# Altium PCB ch3v003f4p6 v2.PcbDoc
Units mm, origin at the board's own origin, x right, y up, seen from the top; angles counter-clockwise.
Board outline 152.4 x 101.6 mm, 2 copper layers (Top Layer, Bottom Layer); 30 components, 34 nets, 125 pads, 15 vias.
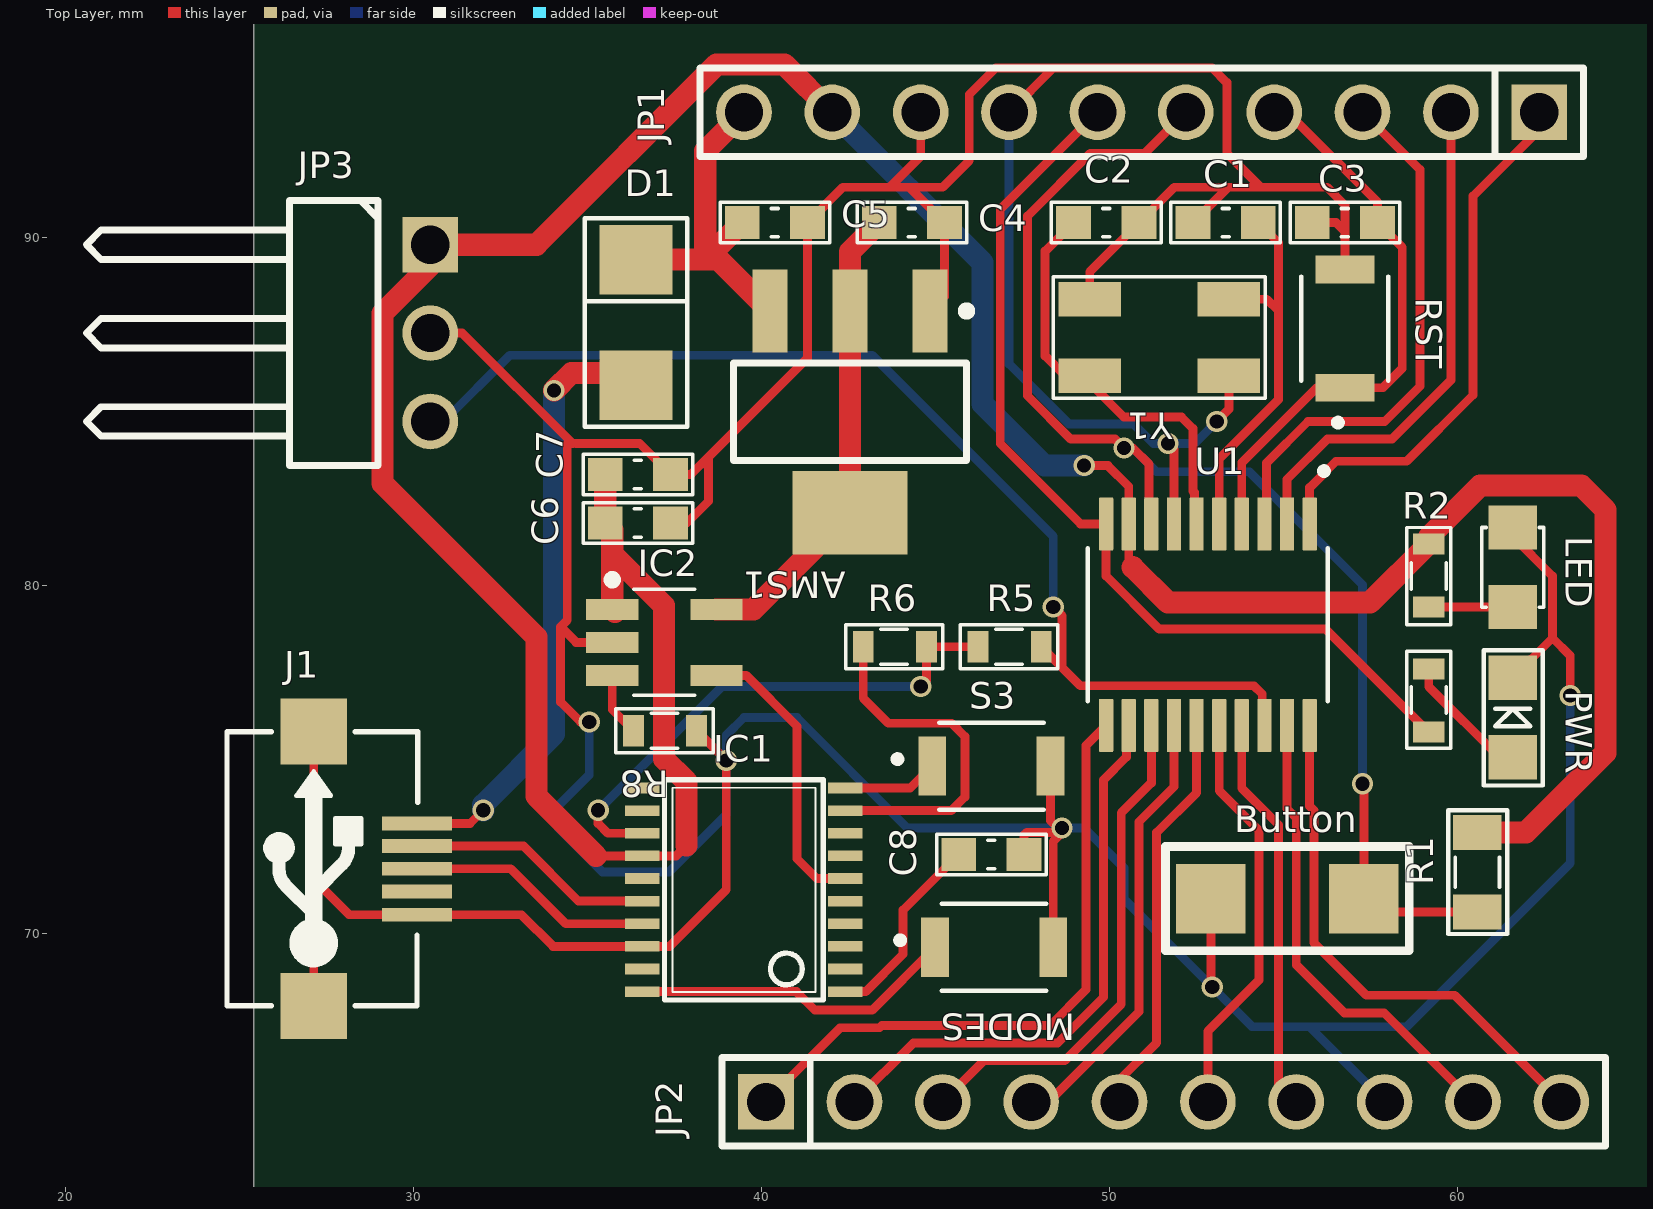
[diagram p0: Top Layer view]
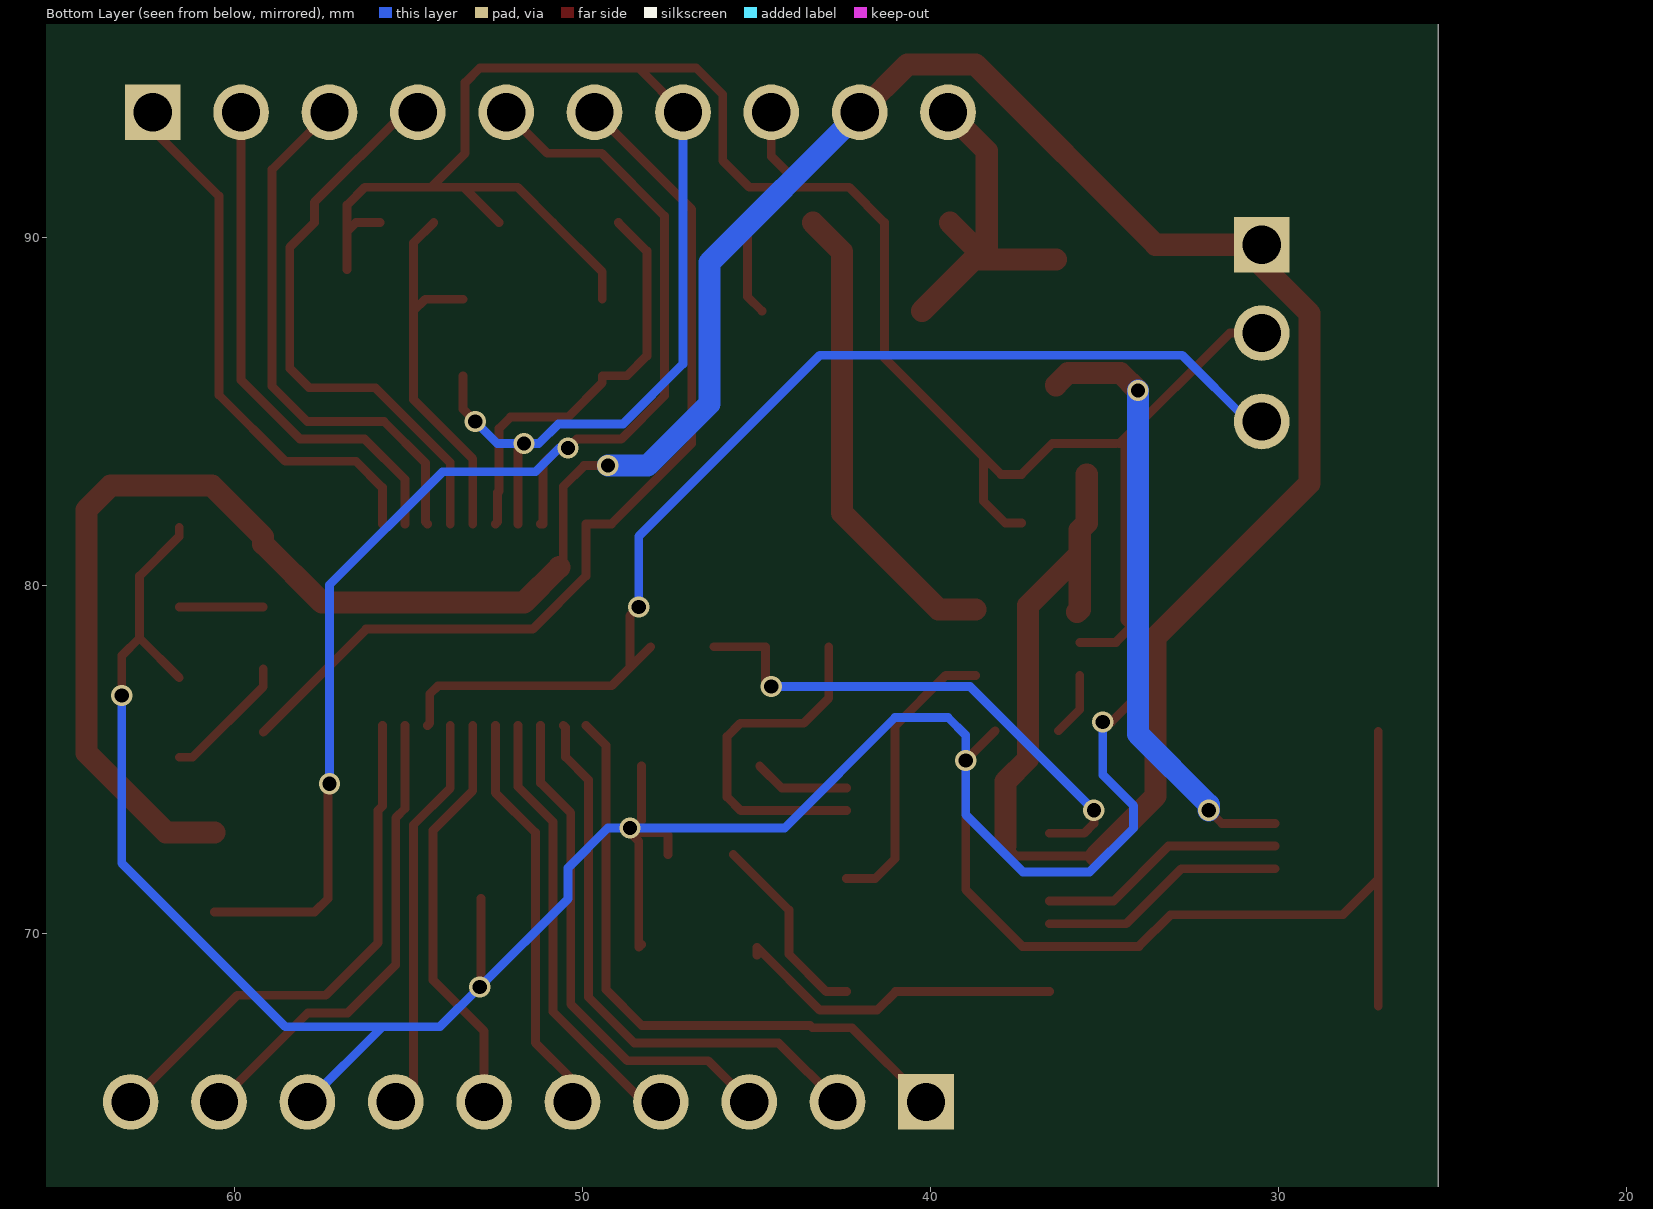
[diagram p1: Bottom Layer view, seen from below]
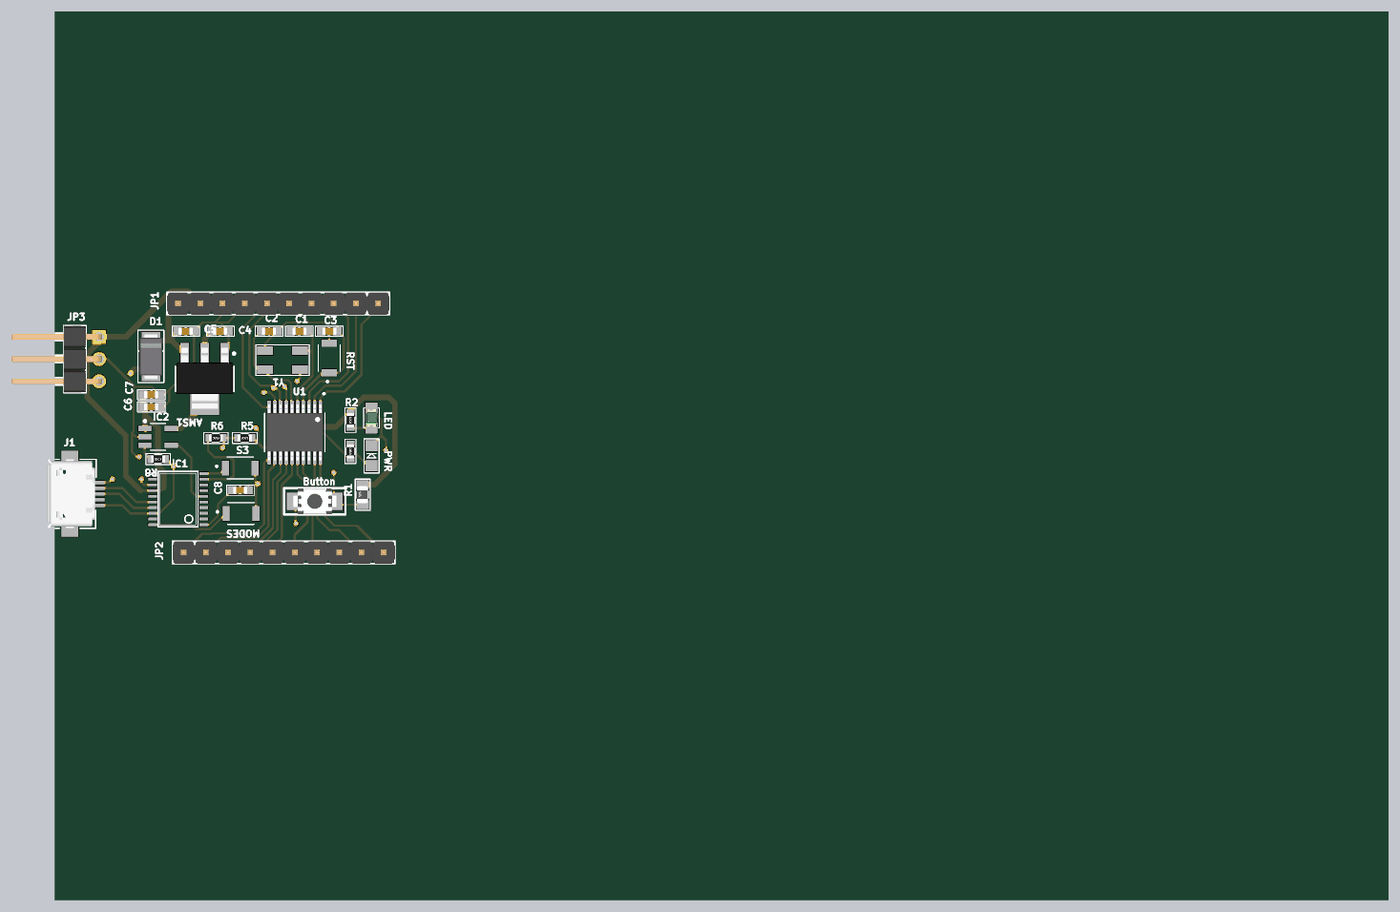
[diagram p2: 3D render of the assembled board from above, using the file's embedded part models]

## Layer stack, top to bottom
Top Solder: solder mask 0.0102, Solder Resist, Dk 3.5
Top Layer: signal copper 0.0356
Dielectric 1: dielectric 0.32, FR-4, Dk 4.8
Bottom Layer: signal copper 0.0356
Bottom Solder: solder mask 0.0102, Solder Resist, Dk 3.5

## Board outline
25.4,25.4 177.8,25.4 177.8,127 25.4,127

## Design rules (kind name [scope] priority, off if disabled: settings)
Clearance [All] p1: gap=0.254 ignorepadtopadclearanceinfootprint=TRUE
PolygonConnect [All] p1: connectstyle=Relief reliefconductorwidth=0.254 reliefentries=4 polygonreliefangle="90 Angle" airgapwidth=0.254
RoutingVias [All] p1: holewidth=0.406 width=0.61 viastyle="Through Hole" minholewidth=0.406 minwidth=0.61 maxholewidth=0.406 maxwidth=0.61
SolderMaskExpansion [All] p1: expansion=0.102
Width [All] p1: maxlimit=0.635 minlimit=0.254 preferedwidth=0.508 minimp=50.000000 maximp=50.000000 favimp=50.000000
30 further rules are at their usual default settings.

## Classes and differential pairs
component class ch32v003f4p6: C1 C2 C3 C4 C5 C6 C7 C8 D1 IC1 J1 JP1 JP2 JP3 LED_POWER LED_USER R1 R2 R5 R6 R8 RST S3 U1 Y1

## Components (designator, comment, footprint, x,y, rotation, side; value= is the part's Value field where it differs from the comment)
AMS1 "AMS1117-3.3V" SOT223 42.545,84.984 r180 top value="AMS1117-3.3V SOT223"
Button "SW-SMD" "SW 3x2x4" 55.118,70.993 r180 top (schematic designator S2)
C1 "22pF" CAP_0603 53.34,90.424 r0 top value=33p
C2 "22pF" CAP_0603 49.911,90.424 r180 top value=33p
C3 "104" CAP_0603 56.769,90.424 r0 top value=33p
C4 "104" CAP_0603 44.323,90.424 r180 top value=33p
C5 "104" CAP_0603 40.386,90.424 r180 top value=33p
C6 "104" CAP_0603 36.449,81.788 r180 top value=33p
C7 "104" CAP_0603 36.449,83.185 r180 top value=33p
C8 "104" CAP_0603 46.609,72.263 r180 top value=33p
D1 "1N4007" DIO-214AC(SMA) 36.449,87.63 r270 top
IC1 "CH32V305FBP6" TSSOP-20 39.497,71.247 r90 top
IC2 "DIO7002BST5" SOT23-5 37.211,78.359 r0 top
J1 "USB-5" USB-M1 30.099,71.852 r90 top
JP1 "JP 1x10 2.54" "JP 1x10 DT" 62.357,93.599 r180 top
JP2 "JP 1x10 2.54" "JP 1x10 DT" 40.132,65.151 r0 top
JP3 "JP 1x3 2.54" "JP 1x3 DC" 27.94,83.439 r270 top
L1 "LED 0805" LED-0805-Green 61.595,79.375 r90 top
L2 "LED 0805" LED_RED_SMD_0805 61.595,76.2 r90 top
R1 "10k" RES_SMD_0805 60.579,71.755 r90 top value="R1/4W - 1K"
R2 "1k" RES-SMD-0603 59.182,80.264 r90 top value="R1/4W - 1K"
R3 "1k" RES-SMD-0603 59.182,76.708 r270 top value="R1/4W - 1K"
R5 "100R" RES-SMD-0603 47.117,78.232 r0 top value="R1/4W - 1K"
R6 "100R" RES-SMD-0603 43.815,78.232 r0 top value="R1/4W - 1K"
R8 "15k" RES-SMD-0603 37.211,75.819 r0 top value="R1/4W - 1K"
RST "B3U-1000P" SW_B3U-1000P 56.769,87.376 r90 top (schematic designator S1)
S3 "B3U-1000P" SW_B3U-1000P 46.609,74.803 r0 top
S4 "B3U-1000P" SW_B3U-1000P 46.687,69.596 r0 top
U1 "CH32V003F4P6" SOP65P640X121-20N 52.832,78.867 r270 top
Y1 "24MHz" "Crystal 4 pin SMD 50x32" 51.435,87.122 r180 top

## Footprints (in the part's own frame and the unit in brackets; to place one, negate y for a bottom-side part, rotate by r counter-clockwise, add the part's x,y. Pads: shape width x height; smd on the part's side, far side on the other; paste and mask are expansions set on the pad)
CAP_0603 [mm]
  rect 1x0.95 smd mask+0.076: 1(-0.94,0) 2(0.94,0)
  silkscreen extent -1.57,-0.58 1.57,0.58, body extent -0.77,-0.39 0.83,0.41, height 0.9
"Crystal 4 pin SMD 50x32" [mm] "Quartz Crystal, SM; Body 6.0 x 3.5 mm (LxW)"
  rect 1.8x1 smd: 1(-2,-1.1) 2(2,-1.1) 3(2,1.1) 4(-2,1.1)
  silkscreen extent -3.05,-1.75 3.05,1.75, body extent -2.48,-1.6 2.53,1.6, height 0.9
DIO-214AC(SMA) [mm] "DO-214AC Diode Smallest Size"
  rect 2x2.1 smd: 1(1.88,-0.051) 2(-1.732,-0.051)
  silkscreen extent -2.92,-1.52 3.07,1.42, body extent -2.5,-1.35 2.7,1.25, height 2.4
"JP 1x3 DC" [mm]
  rect 1.6x1.6 hole 1.1: 1(-6.35,2.54)
  round 1.6 hole 1.1: 2(-3.81,2.54) 3(-1.27,2.54)
  silkscreen extent -7.62,-7.34 0,1.04, body extent -7.62,-7.52 0,2.84, height 2.55
"JP 1x10 DT" [mm] "10 pins, 1 row, straight, gold plating"
  rect 1.6x1.6 hole 1.1: 1(0,0)
  round 1.6 hole 1.1: 2(2.54,0) 3(5.08,0) 4(7.62,0) 5(10.16,0) 6(12.7,0) 7(15.24,0) 8(17.78,0) 9(20.32,0) 10(22.86,0)
  silkscreen extent -1.27,-1.27 24.13,1.27, body extent -1.27,-1.27 24.13,1.27, height 8.54
LED-0805-Green [mil]
  rect 50x55 smd: 1(0,0) 2(90,0)
  silkscreen extent 0,-35 90,35, body extent 5,-25 85,25, height 43
LED_RED_SMD_0805 [mil]
  rect 50x55 smd: 1(-45,0) 2(45,0)
  silkscreen extent -77,-34 76,33, body extent -41,-27 41,27, height 35
RES-SMD-0603 [mm]
  rect 0.6x0.9 smd: 1(-0.889,0) 2(0.927,0)
  silkscreen extent -1.4,-0.64 1.4,0.64, body extent -0.8,-0.4 0.8,0.4, height 0.43
RES_SMD_0805 [mil]
  rect 39.37x55 smd: 1(-45,0) 2(45,0)
  silkscreen extent -70,-34 70,33, body extent -39,-25 39,25, height 31
SOP65P640X121-20N [mm]
  rrect12% 1.52x0.41 smd: 1(-2.895,2.925) 2(-2.895,2.275) 3(-2.895,1.625) 4(-2.895,0.975) 5(-2.895,0.325) 6(-2.895,-0.325) 7(-2.895,-0.975) 8(-2.895,-1.625) 9(-2.895,-2.275) 10(-2.895,-2.925) 11(2.895,-2.925) 12(2.895,-2.275) 13(2.895,-1.625) 14(2.895,-0.975) 15(2.895,-0.325) 16(2.895,0.325) 17(2.895,0.975) 18(2.895,1.625) 19(2.895,2.275) 20(2.895,2.925)
  silkscreen extent -4.51,-3.45 2.2,3.45, body extent -3.2,-3.25 3.2,3.25, height 1.1
SOT23-5 [mm] "SOT23, 5-Leads, Body 3.0x3.0mm (max), Pitch 0.95mm, IPC Medium Density"
  rect 1.5x0.6 smd: 1(-1.5,0.95) 2(-1.5,0) 3(-1.5,-0.95) 4(1.5,-0.95) 5(1.5,0.95)
  silkscreen extent -1.62,-1.52 0.87,1.92, body extent -1.75,-1.52 1.75,1.53, height 1.45
SOT223 [mm]
  rect 1x2.4 smd: 1(-2.3,-2.9) 2(0,-2.9) 3(2.3,-2.9)
  rect 3.3x2.4 smd: 4(0,2.9)
  silkscreen extent -3.48,-3.02 3.35,1.4, body extent -3.25,-3.56 3.25,3.4, height 1.68
"SW 3x2x4" [mm]
  rect 2x2 smd: 1(-2.2,0) 2(2.2,0)
  silkscreen extent -3.5,-1.5 3.5,1.5, body extent -2.45,-1.45 2.45,1.45, height 2
SW_B3U-1000P [mm]
  rect 0.8x1.7 smd: 1(-1.7,0) 2(1.7,0)
  silkscreen extent -2.8,-1.25 1.5,1.25
TSSOP-20 [mil] "TSSOP-20"
  rect 12x39 smd: 1(-115.16,-114.87) 2(-89.57,-114.87) 3(-63.98,-114.87) 4(-38.39,-114.87) 5(-12.8,-114.87) 6(12.8,-114.87) 7(38.39,-114.87) 8(63.98,-114.87) 9(89.57,-114.87) 10(115.16,-114.87) 11(115.16,114.87) 12(89.57,114.87) 13(63.98,114.87) 14(38.39,114.87) 15(12.8,114.87) 16(-12.8,114.87) 17(-38.39,114.87) 18(-63.98,114.87) 19(-89.57,114.87) 20(-115.16,114.87)
  silkscreen extent -125,-90 125,90
USB-M1 [mm]
  rect 0.4x2 smd: 1(1.3,0) 2(0.65,0) 3(0,0) 4(-0.65,0) 5(-1.321,0)
  rect 1.9x1.9 smd: 5(-3.95,2.968) 5(3.95,2.968)
  silkscreen extent -3.94,-0.03 3.94,5.46, body extent -3.98,0.11 4,5.54, height 2.71

## Part data
AMS1: library part "AMS1117 SMD", "Dán", Chung_Loai=Dán, Don_Vi=Con, Ma_Hang=MH000596
Button: "Switch", LatestRevisionDate=17-Jul-2002, LatestRevisionNote="Re-released for DXP Platform.", PackageReference=SPST-2, Published=24-Mar-1999, Publisher="Altium Limited"
C1 C2 C3 C4 C5 C6 C7 C8: library part CapSMD, "Capacitor", LatestRevisionDate=17-Jul-2002, LatestRevisionNote="Re-released for DXP Platform.", PackageReference=RAD-0.3, Published=8-Jun-2000, Publisher="Altium Limited"
D1: library part D1A, "Diode 1A"
IC2: library part "DIO7002BST5 SMD"
J1: Manufacturer=FCI, Manufacturer Part Number=10118193-0001LF, Supplier Part Number 1=609-4616-1-ND, .Checked PCB=RF, .Checked SCH=MM, .Creator=MM, Category="Connectors, Interconnects", ComponentLink1Description=http://portal.fciconnect.com/Comergent//fci/drawing/10118193.pdf, ComponentLink1URL=http://portal.fciconnect.com/Comergent//fci/drawing/10118193.pdf, Connector Type="USB - micro B", Features="Shielded, Solder Retention", Gender=Receptacle, Ingress Protection=-, Mounting Type="Surface Mount, Right Angle, Horizontal", Number of Contacts=5, Packaging="Cut Tape (CT)", Pricing 1="1=0.46, 10=0.433, 25=0.3712, 50=0.3156, 100=0.3032, 250=0.27224, 500=0.25988 (USD)", RoHS="RoHS Compliant", Specifications="USB 2.0", Stock 1=28642, Supplier 1=Digi-Key
JP1 JP2: library part "JP 1x10 2.54 Duc Thang", "C?m", Chung_Loai=C?m, Don_Vi=Con, Ma_Hang=MH000903, Ten_Linh_Kien="Jump Ðon Ð?c 2.54MM 1x40P Th?ng 11MM"
JP3: library part "JP 1x3 2.54 Duc Cong", "C?m", Chung_Loai=C?m, Don_Vi=Con, Ma_Hang=MH000904, Ten_Linh_Kien="Jump Ðon Ð?c 2.54MM 1x40P Cong Ð?ng"
L1 L2: library part "LED 0805 Xanh La", "Dán", Chung_Loai=Dán, Don_Vi=Con, Ma_Hang=MH002326, Ten_Linh_Kien="LED 0805 Màu Xanh Lá (Green)"
R1 R2 R3 R5 R6 R8: library part RES, "Resistor 1/4W"
RST S3 S4: "Switch Tactile N.O. SPST Round Button Gull Wing 0.05A 12VDC 1.5N SMD Embossed T/R", Package=None, Availability=Unavailable, MP=B3U-1000P, Price=None
U1: "Industrial-grade general-purpose microcontroller", Package=Package, Check_prices=https://www.snapeda.com/parts/CH32V003F4P6/WCH/view-part/?ref=eda, MF=WCH, MP=CH32V003F4P6, SnapEDA_Link=https://www.snapeda.com/parts/CH32V003F4P6/WCH/view-part/?ref=snap
Y1: library part "XTAL_4Pin SMD", "Crystal Oscillator", LatestRevisionDate=17-Jul-2002, LatestRevisionNote="Re-released for DXP Platform.", PackageReference=R38, Published=8-Jun-2000, Publisher="Altium Limited"

## Via types
v1: diameter 0.61, hole 0.406, Top Layer to Bottom Layer, 15 vias

## Nets (pads, with @x,y where several pads share a name; then routed paths per layer and width w, separated by ;. In a path a pad name is that pad's centre, name@x,y a point inside that pad or via, vN(x,y) a via of type N, cw(c..) or ccw(c..) an arc to the next point about the centre after c; other vN are vias at no path point)
3V3: C6.2 C7.2 IC1.14 IC2.1 JP1.9 JP3.1 R1.2 R2.2 U1.9 | length 96.2
  Top Layer w0.254: 35.248,72.222 IC1.14 37.551,72.222 37.846,72.517 ; v1(49.276,83.439) 49.957,83.439 50.557,82.839 U1.9 50.557,80.634 50.673,80.518
  Top Layer w0.635: 35.248,72.222 33.528,73.942 33.528,78.514 29.108,82.934 29.108,87.817 30.48,89.189 JP3.1 33.528,89.789 38.71,94.971 40.665,94.971 JP1.9 ; C7.2 C6.2 35.711,81.586 35.711,80.899 ; IC2.1@35.79,79.23 IC2.1 35.711,80.899 ; 37.846,72.517 37.846,74.361 37.193,75.014 37.193,79.417 35.711,80.899 ; 50.673,80.518 51.689,79.502 57.493,79.502 R2.2 59.182,81.39 60.66,82.867 63.563,82.867 64.262,82.169 64.262,75.184 61.976,72.898 R1.2
  Bottom Layer w0.635: JP1.9 46.355,89.281 46.355,85.217 48.133,83.439 v1(49.276,83.439)
3V3_IN: AMS1.2 AMS1.4 C4.2 IC2.5 | length 13.7
  Top Layer w0.635: IC2.5 39.77,79.309 AMS1.4 AMS1.2 42.545,89.586 C4.2
5V_IN: AMS1.3 C5.2 D1.2 JP1.10 | length 10.7
  Top Layer w0.635: D1.2 38.385,89.362 ; C5.2 38.385,89.362 ; JP1.10 38.385,92.487 38.385,89.362 ; AMS1.3 38.767,89.362 38.385,89.362
D+: IC1.17 J1.3 | length 7.1
  Top Layer w0.254: J1.3 32.796,71.852 34.376,70.272 IC1.17
D-: IC1.16 J1.2 | length 7.1
  Top Layer w0.254: J1.2 33.162,72.502 34.742,70.922 IC1.16
GND: AMS1.1 Button.2 C1.1 C2.1 C3.1 C4.1 C5.1 C6.1 C7.1 C8.1 IC1.18 IC2.2 J1.5 JP1.7 JP1.8 JP2.8 JP3.2 L1.2 L2.2 R8.2 RST.2 S3.2 S4.2 U1.7 Y1.2 Y1.4 | length 183.2
  Top Layer w0.254: J1.5@27.131,67.902 27.131,71.548 ; J1.5@27.131,75.802 27.131,71.548 ; JP3.2 31.397,87.249 34.572,84.074 34.417,84.074 34.417,78.994 34.227,78.803 ; 34.671,84.074 36.5,84.074 C7.1 37.973,83.185 38.481,83.693 ; v1(35.052,76.073) 34.798,76.073 34.227,76.644 34.227,78.803 ; IC2.2 34.671,78.359 34.227,78.803 ; C6.1 37.846,81.788 38.481,82.423 38.481,83.693 ; R8.2 v1(38.989,74.968) 38.989,71.247 37.364,69.622 IC1.18 34.01,69.622 33.101,70.531 30.099,70.531 28.148,70.531 27.131,71.548 ; JP1.8 44.577,92.329 43.688,91.44 ; AMS1.1 45.263,88.302 C4.1 44.247,91.44 ; JP1.7 48.387,94.869 ; C8.1 47.549,72.822 47.625,72.898 v1@48.641,72.898 ; S4.2@48.309,69.674 S4.2 48.387,72.644 v1@48.641,72.898 ; S3.2 48.309,73.23 v1@48.641,72.898 ; Y1.2 49.435,89.008 C2.1 51.867,91.44 53.416,91.44 ; v1(51.689,84.074) 51.857,83.906 U1.7 ; C1.1 53.416,91.44 ; Button.2 52.918,68.494 v1(52.959,68.453) ; v1(53.086,84.709) 53.435,85.058 Y1.4 ; C3.1 56.515,90.424 56.769,90.17 ; RST.2 56.769,90.17 ; L2.2 62.738,78.486 ; L1.2 61.595,81.407 62.738,80.264 62.738,78.486 ; v1@63.246,76.708 v1(63.246,76.835) 63.246,77.978 62.738,78.486 ; 38.481,83.693 41.326,86.538 C5.1 42.342,91.44 43.688,91.44 ; 43.688,91.44 44.247,91.44 ; 44.247,91.44 45.212,91.44 45.974,92.202 45.974,94.107 46.736,94.869 48.387,94.869 ; 48.387,94.869 52.959,94.869 53.378,94.45 53.378,92.418 54.356,91.44 ; 53.416,91.44 54.356,91.44 ; 54.356,91.44 56.261,91.44 56.769,90.932 56.769,90.17
  Bottom Layer w0.254: v1(35.052,76.073) 35.052,74.549 34.163,73.66 34.163,73.025 35.433,71.755 37.338,71.755 38.989,73.406 v1(38.989,74.968) 38.989,75.692 39.497,76.2 41.021,76.2 44.196,73.025 v1(48.641,73.025) 49.276,73.025 50.419,71.882 50.419,70.993 v1(52.959,68.453) 54.102,67.31 55.753,67.31 ; JP1.7 47.117,86.36 48.844,84.633 50.703,84.633 51.262,84.074 v1(51.689,84.074) 52.451,84.074 v1(53.086,84.709) ; JP2.8 55.753,67.31 ; v1(63.246,76.835) 63.246,72.009 58.547,67.31 55.753,67.31
IAP: IC1.10 S3.1 | length 2.8
  Top Layer w0.254: IC1.10 44.278,74.172 S3.1
MODES: IC1.20 S4.1 | length 9.6
  Top Layer w0.254: IC1.20 41.005,68.322 41.538,67.789 43.18,67.789 S4.1 S4.1@44.987,69.371
NetC8_2: C8.2 IC1.1 | length 5.6
  Top Layer w0.254: IC1.1 42.995,68.322 44.069,69.396 44.069,70.663 C8.2
NetIC2_3: IC2.3 R8.1 | length 1.8
  Top Layer w0.254: IC2.3 35.711,76.43 R8.1
NetL1_1: L1.1 R2.1 | length 2.4
  Top Layer w0.254: R2.1 L1.1
NetL2_1: L2.1 R3.1 | length 3.8
  Top Layer w0.254: R3.1 59.182,77.089 61.214,75.057 L2.1
PB13: IC1.6 IC2.4 | length 8.4
  Top Layer w0.254: IC2.4 39.558,77.409 41.021,75.946 41.021,72.138 41.587,71.572 IC1.6
PC0: JP1.6 R3.2 U1.10 | length 27.3
  Top Layer w0.254: JP1.6 46.863,90.805 46.863,84.074 49.175,81.762 U1.10 49.907,80.268 51.435,78.74 56.223,78.74 R3.2
PC1: JP2.1 U1.11 | length 18.4
  Top Layer w0.254: JP2.1 42.262,67.281 43.39,67.281 43.457,67.348 48.298,67.348 49.327,68.377 49.327,75.392 U1.11
PC2: JP2.2 U1.12 | length 16.5
  Top Layer w0.254: JP2.2 44.361,66.84 48.508,66.84 49.835,68.166 49.835,74.41 50.493,75.069 50.493,75.908 U1.12
PC3: JP2.3 U1.13 | length 14.7
  Top Layer w0.254: JP2.3 46.393,66.332 48.719,66.332 50.343,67.956 50.343,73.457 51.207,74.321 U1.13
PC4: JP2.4 U1.14 | length 12.8
  Top Layer w0.254: JP2.4 48.256,65.151 50.851,67.746 50.851,73.203 51.857,74.209 U1.14
PC5: JP2.5 U1.15 | length 11.7
  Top Layer w0.254: JP2.5 50.292,65.786 51.359,66.853 51.359,72.893 52.507,74.041 U1.15
PC6: JP2.6 U1.16 | length 11.9
  Top Layer w0.254: JP2.6 52.832,67.183 54.299,68.65 54.299,72.955 53.157,74.097 U1.16
PC6_WCH: IC1.9 R6.1 | length 10.2
  Top Layer w0.254: IC1.9 45.455,73.522 45.847,73.914 45.847,75.654 45.467,76.034 43.649,76.034 42.926,76.757 R6.1
PC7: JP2.7 U1.17 | length 11.5
  Top Layer w0.254: U1.17 53.807,74.165 54.864,73.108 54.864,65.659 JP2.7
PD0: Button.1 JP1.5 R1.1 U1.8 | length 38
  Top Layer w0.254: U1.8 51.143,81.762 51.143,83.477 50.673,83.947 v1(50.419,83.947) 50.165,84.201 48.895,84.201 47.646,85.45 47.646,90.613 49.451,92.418 51.016,92.418 JP1.5 ; v1(57.277,74.295) 57.318,74.254 Button.1 57.699,70.612 R1.1
  Bottom Layer w0.254: v1(50.419,83.947) 50.67,83.947 51.356,83.261 54.026,83.261 57.277,80.01 v1(57.277,74.295)
PD2: JP2.9 U1.19 | length 13.7
  Top Layer w0.254: U1.19 55.107,73.584 55.372,73.319 55.372,69.088 56.75,67.71 57.893,67.71 JP2.9
PD3: JP2.10 U1.20 | length 15.3
  Top Layer w0.254: U1.20 55.757,73.652 55.88,73.529 55.88,69.723 57.385,68.218 59.925,68.218 JP2.10
PD4: JP1.1 U1.1 | length 15.8
  Top Layer w0.254: U1.1 55.757,82.808 56.515,83.566 58.547,83.566 60.452,85.471 60.452,91.186 62.357,93.091 JP1.1
PD5: JP1.2 U1.2 | length 14.9
  Top Layer w0.254: U1.2 55.107,83.047 56.261,84.201 58.122,84.201 59.817,85.896 JP1.2
PD6: JP1.3 U1.3 | length 15.7
  Top Layer w0.254: U1.3 54.521,81.826 54.521,83.521 55.709,84.709 57.912,84.709 58.928,85.725 58.928,91.948 JP1.3
RST: C3.2 JP1.4 RST.1 U1.4 | length 16.6
  Top Layer w0.254: U1.4 53.807,83.525 55.958,85.676 RST.1 57.863,85.676 58.42,86.233 58.42,89.713 C3.2 57.709,91.008 55.118,93.599 JP1.4
SWDIO: IC1.13 R5.1 R6.2 | length 15.2
  Top Layer w0.254: v1(35.306,73.533) 35.306,73.152 35.586,72.872 IC1.13 ; v1(44.577,77.089) 44.742,77.254 R6.2 R5.1
  Bottom Layer w0.254: v1(35.306,73.533) 38.862,77.089 v1(44.577,77.089)
SWIO: JP3.3 R5.2 U1.18 | length 32.6
  Top Layer w0.254: R5.2 48.641,77.635 ; v1(48.387,79.375) 48.641,79.121 48.641,77.635 ; U1.18 54.393,76.036 54.393,76.875 54.155,77.113 49.163,77.113 48.641,77.635
  Bottom Layer w0.254: JP3.3 30.861,84.709 32.766,86.614 43.18,86.614 48.387,81.407 v1(48.387,79.375)
VCC: D1.1 J1.1 | length 17.7
  Top Layer w0.254: J1.1 31.623,73.152 v1(32.004,73.533)
  Top Layer w0.635: v1(34.036,85.598) 34.544,86.106 36.043,86.106 D1.1
  Bottom Layer w0.635: v1(32.004,73.533) 32.004,73.691 34.036,75.723 v1(34.036,85.598)
X0: C2.2 U1.6 Y1.3 | length 12.2
  Top Layer w0.254: C2.2 48.154,89.607 48.154,86.593 48.725,86.022 Y1.3 49.435,85.82 50.419,84.836 52.07,84.836 52.4,84.506 52.4,82.708 52.443,82.665 52.443,81.826 U1.6
XI: C1.2 U1.5 Y1.1 | length 11.2
  Top Layer w0.254: U1.5 53.157,83.637 54.864,85.344 54.864,87.884 ; Y1.1 54.526,88.222 54.864,87.884 ; C1.2 54.864,89.84 54.864,87.884
pads on no net: IC1.2 IC1.3 IC1.4 IC1.5 IC1.7 IC1.8 IC1.11 IC1.12 IC1.15 IC1.19 J1.4

## Silkscreen, mask and mechanical layers (free items; w line width, h text height)
Top Overlay:
  text "LED" at 63.119,81.407 h0.76 r270
  text "PWR" at 63.119,76.962 h0.76 r270
  text "MODES" at 49.022,67.691 h0.76 r180